# Altium PCB MD017A ISO-F28027F.PcbDoc (part 2 of 2)
Units mil, origin at the board's own origin, x right, y up, seen from the top; angles counter-clockwise.
Board outline 2600 x 2000 mil, 2 copper layers (Top, Bottom), stack 61.811 mil thick; 81 components, 98 nets, 369 pads, 191 vias.
Unrouted connection lines stored in the file: 2.
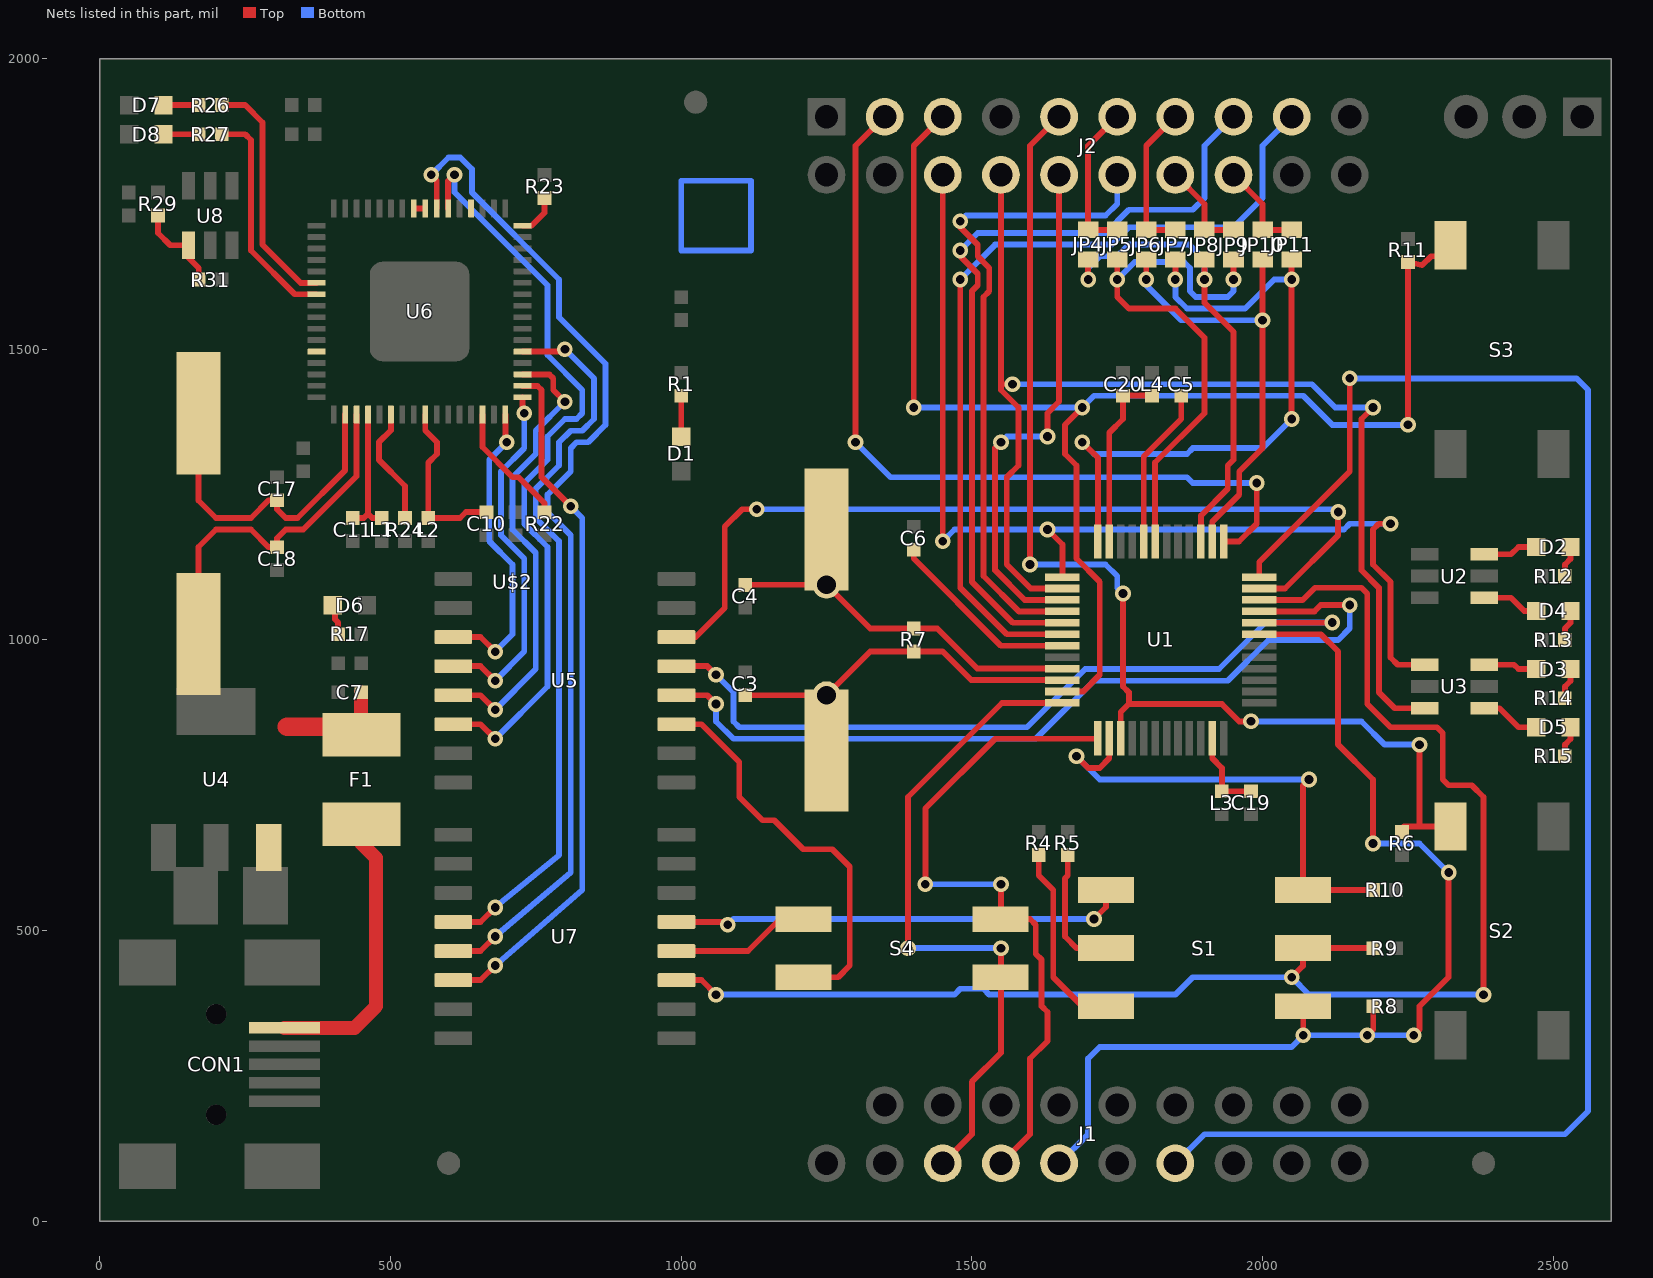
[diagram p2: the nets of this part, all layers, seen from the top]

## Via types
v1: diameter 27/27 (per signal layer), hole 15, Top to Bottom, tented both sides, 191 vias

## Nets (pads, with @x,y where several pads share a name; then routed paths per layer and width w, separated by ;. In a path a pad name is that pad's centre, name@x,y a point inside that pad or via, vN(x,y) a via of type N, cw(c..) or ccw(c..) an arc to the next point about the centre after c; other vN are vias at no path point) (continued)
GPIO2: J2.6 U1.37 U3.1 | length 1835.4
  Top w10: v1(1450,1170) J2.6@1450,1800 ; v1(1630,1190) 1655.71,1164.29 U1.37@1655.71,1108.27 ; v1(2220,1200) 2200,1200 2190,1190 2190,1130 2220,1100 2220,970 2232.6,957.4 U3.1@2278.82,957.4
  Bottom w10: v1(1450,1170) 1470,1190 v1(1630,1190) 2140,1190 2150,1200 v1(2220,1200)
GPIO3: J2.8 U1.38 U3.3 | length 2061
  Top w10: J2.8@1550,1800 1550,1440 ; v1(1570,1440) 1550,1440 ; U1.38@1655.71,1088.58 1601.42,1088.58 1560,1130 1560,1280 1580,1300 1580,1400 1550,1430 1550,1440 ; v1(2190,1400) 2170,1380 2170,1120 2200,1090 2200,910 2227.4,882.6 U3.3@2278.82,882.6
  Bottom w10: v1(1570,1440) 2085,1440 2125,1400 v1(2190,1400)
GPIO4: J2.10 U1.39 | length 903.4
  Top w10: v1(1550,1340) 1540,1330 1540,1120 1591.1,1068.9 U1.39@1655.71,1068.9 ; v1(1630,1350) 1630,1390 1650,1410 J2.10@1650,1800
  Bottom w10: v1(1550,1340) 1560,1350 v1(1630,1350)
GPIO5: J2.12 U1.40 | length 1128.2
  Top w10: v1(1480,1720) 1480,1710 1510,1680 1510,1660 1530,1640 1530,1600 1520,1590 1520,1110 1580.79,1049.21 U1.40@1655.71,1049.21
  Bottom w10: v1(1480,1720) 1490,1730 1730,1730 1750,1750 J2.12@1750,1800
GPIO6: J2.15 U1.41 | length 1389.5
  Top w10: v1(1480,1670) 1480,1660 1510,1630 1510,1610 1500,1600 1500,1100 1570.47,1029.53 U1.41@1655.71,1029.53
  Bottom w10: v1(1480,1670) 1510,1700 1730,1700 1770,1740 1880,1740 1900,1760 1900,1850 J2.15@1950,1900
GPIO7: J2.17 U1.42 | length 1477.6
  Top w10: v1(1480,1620) 1480,1090 1560.16,1009.84 U1.42@1655.71,1009.84
  Bottom w10: v1(1480,1620) 1540,1680 1740,1680 1770,1710 1950,1710 2000,1760 2000,1850 J2.17@2050,1900
GPIO12: J2.5 R11.1 S3.P$4 U1.47 | length 2341.5
  Top w10: v1(1400,1400) 1400,1850 J2.5@1450,1900 ; U1.47@1655.71,911.42 1691.42,911.42 1720,940 1720,1100 1680,1140 1680,1300 1660,1320 1660,1370 v1(1690,1400) ; v1(2250,1370) R11.1@2250,1650.31 2274.41,1644.41 2290,1660 2304,1660 S3.P$4@2323,1679
  Bottom w10: v1(1400,1400) v1(1690,1400) 1710,1420 2070,1420 2120,1370 v1(2250,1370)
GPIO16: JP4.2 JP8.2 U1.27 | length 838.2
  Top w10: v1(1700,1620) JP4.2@1700,1641 ; U1.27@1893.9,1169.29 1893.9,1213.9 1940,1260 1940,1300 1950,1310 1950,1530 1900,1580 v1(1900,1620) JP8.2@1900,1641
  Bottom w10: v1(1700,1620) 1700,1640 1720,1660 1750,1660 1770,1680 1874.41,1680 1900,1654.41 v1(1900,1620) 1900,1640
GPIO17: JP6.2 JP10.2 U1.26 | length 763.4
  Top w10: v1(1800,1620) JP6.2@1800,1641 ; U1.26@1913.58,1169.29 1913.58,1203.58 1960,1250 1960,1290 2000,1330 v1(2000,1550) JP10.2@2000,1641
  Bottom w10: v1(1800,1620) 1800,1610 1860,1550 v1(2000,1550)
GPIO18: J1.14 U1.24 | length 2811.8
  Top w10: U1.24@1994.29,1108.27 1994.29,1134.29 2150,1290 v1(2150,1450)
  Bottom w10: J1.14@1850,100 1900,150 2520,150 2560,190 2560,1430 2540,1450 v1(2150,1450)
GPIO19: J2.3 U1.25 | length 1439.2
  Top w10: v1(1300,1340) 1300,1850 J2.3@1350,1900 ; U1.25@1933.27,1169.29 1959.29,1169.29 1990,1200 v1(1990,1270)
  Bottom w10: v1(1300,1340) 1360,1280 1870,1280 1880,1270 v1(1990,1270)
GPIO28: J1.6 S4.P$1 U1.48 | length 1164.5
  Top w10: v1(1390,470) 1390,730 1551.73,891.73 U1.48@1655.71,891.73 ; J1.6@1450,100 1500,150 1500,240 1550,290 1550,419.5 S4.P$1@1549.5,420 1550,420.5 v1(1550,470)
  Bottom w10: v1(1390,470) v1(1550,470)
GPIO29: J1.8 S4.P$3 U1.1 | length 1183
  Top w10: v1(1420,580) 1420,710 1540,830 1716.02,830 U1.1@1716.73,830.71 ; J1.8@1550,100 1600,150 1600,280 1630,310 1630,360 1620,370 1620,450 1610,460 1610,510 1600,520 S4.P$3@1549.5,520 1550,520.5 v1(1550,580)
  Bottom w10: v1(1420,580) v1(1550,580)
GPIO32: JP5.2 JP9.2 U1.31 | length 921.7
  Top w10: JP5.2@1750,1641 v1(1750,1620) 1750,1590 1770,1570 1850,1570 1900,1520 1900,1390 1815.16,1305.16 U1.31@1815.16,1169.29 ; v1(1950,1620) JP9.2@1950,1641
  Bottom w10: v1(1750,1620) 1780,1650 1865,1650 1875,1640 1875,1600 1885,1590 1940,1590 1950,1600 v1(1950,1620)
GPIO33: JP7.2 JP11.2 U1.36 | length 1115.9
  Top w10: v1(1690,1340) 1716.73,1313.27 U1.36@1716.73,1169.29 ; v1(1850,1620) JP7.2@1850,1641 ; v1(2050,1380) v1(2050,1620) JP11.2@2050,1641
  Bottom w10: v1(1690,1340) 1710,1320 1870,1320 1880,1330 2000,1330 v1(2050,1380) ; v1(1850,1620) 1850,1590 1870,1570 1970,1570 2020,1620 v1(2050,1620)
GPIO34: J1.10 R8.2 S1.1 U1.19 | length 1846.6
  Top w10: U1.19@1994.29,1009.84 2100.16,1009.84 2130,980 2130,820 2190,760 v1(2190,650) ; S1.1@2069.29,370 2070,369.29 v1(2070,320) ; v1@2184.41,324.41 v1(2180,320) 2190.32,330.32 R8.2@2190.31,370 ; v1(2260,320) 2270,330 2270,370 2320,420 v1(2320,600)
  Bottom w10: J1.10@1650,100 1700,150 1700,280 1720,300 2050,300 v1(2070,320) v1(2180,320) v1(2260,320) ; v1(2190,650) 2270,650 v1(2320,600)
J2: J2.11 JP4.1 JP5.1 | length 218.7
  Top w10: JP4.1@1700,1718 1700,1850 J2.11@1750,1900 ; JP4.1@1717,1705 JP5.1@1733,1705
JTAG_TRST: S1.4 U7.5 | length 834.8
  Top w10: U7.5@981.1,515 1075,515 v1(1080,510) ; v1(1710,520) 1730.71,540.71 S1.4@1730.71,570 1770,579.29 S1.4@1770,580
  Bottom w10: v1(1080,510) 1090,520 v1(1710,520)
N$1: U5.3 U6.P$16 | length 521.7
  Top w10: U5.3@618.9,1005 655,1005 v1(680,980) ; U6.P$16@697.64,1387.83 697.64,1342.36 v1(700,1340)
  Bottom w10: v1(680,980) 710,1010 710,1130 670,1170 670,1310 v1(700,1340)
N$2: C17.1 U6.P$2 U$2.1@170,1390 | length 578.3
  Top w10: U$2.1@170,1390 170,1240 200,1210 260,1210 290.32,1240.31 C17.1@305,1240.31 305,1225 320,1210 340,1210 422.05,1292.05 U6.P$2@422.05,1387.83
N$3: C19.1 L3.1 U1.11 | length 147.8
  Top w10: U1.11@1913.58,830.71 1913.58,796.42 1930,780 L3.1@1930,739.69 C19.1@1980,739.69
N$4: U5.4 U6.P$17 | length 613.8
  Top w10: U5.4@618.9,955 655,955 v1(680,930) ; U6.P$17@727.17,1417.36 727.17,1392.83 v1(730,1390)
  Bottom w10: v1(680,930) 730,980 730,1140 690,1180 690,1290 730,1330 v1(730,1390)
N$5: U6.P$18 U7.14 | length 1194.7
  Top w10: U7.14@618.9,415 655,415 v1(680,440) ; U6.P$18@727.17,1437.05 752.95,1437.05 760,1430 760,1280 v1(810,1230)
  Bottom w10: v1(680,440) 830,570 830,1210 v1(810,1230)
N$6: U5.5 U6.P$19 | length 788.2
  Top w10: U5.5@618.9,905 655,905 v1(680,880) ; U6.P$19@727.17,1456.73 773.27,1456.73 780,1450 780,1430 v1(800,1410)
  Bottom w10: v1(680,880) 750,950 750,1150 710,1190 710,1280 750,1320 750,1360 v1(800,1410)
N$7: C18.1 U6.P$3 U$2.2@170,1010 | length 612.3
  Top w10: U$2.2@170,1010 170,1160 200,1190 260,1190 290.32,1159.69 C18.1@305,1159.69 305,1175 320,1190 350,1190 441.73,1281.73 U6.P$3@441.73,1387.83
N$8: C3.1 R7.2 U1.46 U$2.2@1250,810 U$2.2@1250,905 | length 692.3
  Top w10: C3.1@1110,905.31 1115.59,905 U$2.2@1250,905 ; U$2.2@1250,810 U$2.2@1250,905 ; U1.46@1655.71,931.1 1498.9,931.1 1449.69,980.32 R7.2@1400,980.31 1325.31,980.32 U$2.2@1250,905
N$9: R4.1 S1.6 | length 332.1
  Top w10: R4.1@1615,630.31 1615,595 1640,570 1640,420 1690,370 S1.6@1730.71,370
N$10: R5.1 S1.5 | length 221.4
  Top w10: R5.1@1665,630.31 1665,595 1660,590 1660,490 1680,470 S1.5@1730.71,470
N$11: C4.1 R7.1 U1.45 U$2.1@1250,1095 U$2.1@1250,1190 | length 700.5
  Top w10: C4.1@1110,1094.69 1115.59,1095 U$2.1@1250,1095 ; U$2.1@1250,1190 U$2.1@1250,1095 ; U1.45@1655.71,950.79 1509.21,950.79 1440.31,1019.69 R7.1@1400,1019.69 1325.31,1019.69 U$2.1@1250,1095
N$12: R29.1 R31.1 U8.1 | length 157.9
  Top w10: R29.1@100,1730.31 100,1700 121.18,1678.82 U8.1@152.6,1678.82 152.6,1657.4 170.32,1639.69 R31.1@170.31,1620
N$13: U6.P$21 U7.12 | length 1248.4
  Top w10: U7.12@618.9,515 655,515 v1(680,540) ; U6.P$21@727.17,1496.1 796.1,1496.1 v1(800,1500)
  Bottom w10: v1(680,540) 790,630 790,1170 750,1210 750,1260 790,1300 790,1340 810,1360 830,1360 850,1380 850,1450 v1(800,1500)
N$14: R23.1 U6.P$32 | length 72.4
  Top w10: U6.P$32@727.17,1712.64 742.64,1712.64 765,1735 R23.1@765,1760.31
N$15: U6.P$40 U6.P$41 | length 19.7
  Top w10: U6.P$41@540.16,1742.17 U6.P$40@559.84,1742.17
N$16: U5.6 U6.P$38 | length 1301.9
  Top w10: U6.P$38@599.21,1742.17 599.21,1789.21 v1(610,1800) ; U5.6@618.9,855 655,855 v1(680,830)
  Bottom w10: v1(610,1800) 610,1770 770,1610 770,1490 830,1430 830,1390 820,1380 800,1380 770,1350 770,1310 730,1270 730,1200 770,1160 770,920 v1(680,830)
N$17: R24.2 U6.P$6 | length 205.4
  Top w10: U6.P$6@500.79,1387.83 500.79,1360.79 480,1340 480,1310 525,1265 R24.2@525,1209.69
N$18: C5.1 U1.32 | length 277.7
  Top w10: U1.32@1795.47,1169.29 1795.47,1315.47 1860,1380 C5.1@1860,1420.31
N$19: R26.1 U6.P$54 | length 412.8
  Top w10: R26.1@209.69,1920 250,1920 280,1890 280,1680 345.79,1614.21 U6.P$54@372.83,1614.21
N$20: C11.1 L1.2 U6.P$4 | length 226.9
  Top w10: C11.1@435,1209.69 454.09,1209.69 461.42,1217.01 ; U6.P$4@461.42,1387.83 461.42,1217.01 ; L1.2@485,1209.69 468.74,1209.69 461.42,1217.01
N$21: U6.P$39 U7.13 | length 1769.2
  Top w10: v1(570,1800) 579.53,1790.47 U6.P$39@579.53,1742.17 ; U7.13@618.9,465 655,465 v1(680,490)
  Bottom w10: v1(570,1800) 600,1830 620,1830 640,1810 640,1770 790,1620 790,1555 870,1475 870,1370 840,1340 820,1340 810,1330 810,1290 770,1250 770,1220 810,1180 810,600 v1(680,490)
N$22: R27.1 U6.P$55 | length 388.5
  Top w10: R27.1@209.69,1870 250,1870 260,1860 260,1670 335.47,1594.53 U6.P$55@372.83,1594.53
N$23: D7.C R26.2 | length 60.8
  Top w10: D7.C@109.53,1920 R26.2@170.31,1920
N$24: D8.C R27.2 | length 60.8
  Top w10: D8.C@109.53,1870 R27.2@170.31,1870
N$25: C6.1 U1.43 | length 333.1
  Top w10: C6.1@1400,1155.31 1400,1140 1549.84,990.16 U1.43@1655.71,990.16
N$26: C10.1 L2.2 U6.P$9 | length 297.1
  Top w10: U6.P$9@559.84,1387.83 559.84,1360.16 580,1340 580,1320 565,1305 L2.2@565,1209.69 619.69,1209.69 630,1220 664.69,1220 C10.1@665,1219.69
N$27: D1.A R1.1 | length 70.8
  Top w10: D1.A@1000,1349.53 R1.1@1000,1420.31
N$28: D2.C U2.6 | length 94.5
  Top w10: U2.6@2381.18,1147.4 2427.4,1147.4 2440,1160 D2.C@2470.47,1160
N$29: D4.C U2.4 | length 98.7
  Top w10: U2.4@2381.18,1072.6 2427.4,1072.6 2450,1050 D4.C@2470.47,1050
N$30: D2.A R12.1 | length 54.1
  Top w10: R12.1@2519.69,1110 2520,1110.31 2520,1130 2529.53,1139.53 D2.A@2529.53,1160
N$31: D4.A R13.1 | length 54.1
  Top w10: R13.1@2519.69,1000 2520,1000.32 2520,1020 2529.53,1029.53 D4.A@2529.53,1050
N$32: D6.A R17.1 | length 54.1
  Top w10: D6.A@400.47,1060 404.41,1056.06 404.41,1035.59 410,1030 410,1010.32 R17.1@410.31,1010
N$34: R22.2 U6.P$14 | length 218.2
  Top w10: U6.P$14@658.27,1387.83 658.27,1331.73 710,1280 720,1280 765,1235 R22.2@765,1219.69
N$35: D3.C U3.6 | length 92.4
  Top w10: U3.6@2381.18,957.4 2432.6,957.4 2440,950 D3.C@2470.47,950
N$36: D5.C U3.4 | length 102.8
  Top w10: U3.4@2381.18,882.6 2407.4,882.6 2440,850 D5.C@2470.47,850
N$37: D3.A R14.1 | length 54.1
  Top w10: R14.1@2519.69,900 2520,900.32 2520,920 2529.53,929.53 D3.A@2529.53,950
N$38: D5.A R15.1 | length 54.1
  Top w10: R15.1@2519.69,800 2520,800.32 2520,820 2529.53,829.53 D5.A@2529.53,850
N$39: C20.1 L4.1 U1.35 | length 310.8
  Top w10: U1.35@1736.42,1169.29 1736.42,1356.42 1760,1380 C20.1@1760,1420.31 L4.1@1810,1420.31
N$40:  | length 480
  Bottom w10: 1000,1670 1120,1670 1120,1790 1000,1790 1000,1670
N$41: J2.14 JP8.1 JP9.1 | length 118.7
  Top w10: J2.14@1850,1800 1900,1750 JP8.1@1900,1718 ; JP8.1@1917,1705 JP9.1@1933,1705
N$42: J2.13 JP6.1 JP7.1 | length 218.7
  Top w10: JP6.1@1800,1718 1800,1850 J2.13@1850,1900 ; JP6.1@1817,1705 JP7.1@1833,1705
N$48: J2.16 JP10.1 JP11.1 | length 118.7
  Top w10: J2.16@1950,1800 2000,1750 JP10.1@2000,1718 ; JP10.1@2017,1705 JP11.1@2033,1705
PWREN#: U6.P$60
RESET#: J2.9 R6.1 S2.P$4 U1.3 | length 2001.8
  Top w10: v1(1600,1130) 1600,1850 J2.9@1650,1900 ; U1.3@1756.1,830.71 1756.1,876.1 1770,890 ; v1(1760,1080) 1760,920 1770,910 1770,890 ; v1(1980,860) 1960,860 1930,890 1770,890 ; R6.1@2240,669.69 2243.41,679 2270,679 ; v1(2270,820) 2270,679 ; S2.P$4@2323,679 2270,679
  Bottom w10: v1(1600,1130) 1730,1130 1750,1110 1750,1090 v1(1760,1080) ; v1(1980,860) 2170,860 2210,820 v1(2270,820)
SCI_RX: S4.P$2 U5.11 | length 703.3
  Top w10: U5.11@981.1,855 1035,855 1100,790 1100,730 1140,690 1160,690 1210,640 1260,640 1290,610 1290,440 1270,420 S4.P$2@1210.5,420
SCI_TX: S4.P$4 U7.4 | length 252.2
  Top w10: U7.4@981.1,465 1115,465 1170,520 S4.P$4@1210.5,520
SUSPEND#: U6.P$36
TCK: U1.23 U5.14 | length 1537.7
  Top w10: U5.14@981.1,1005 1025,1005 1075,1055 1075,1195 1105,1225 v1(1130,1225) ; U1.23@1994.29,1088.58 2038.58,1088.58 2130,1180 v1(2130,1220)
  Bottom w10: v1(1130,1225) 2125,1225 v1(2130,1220)
TDI: U1.20 U5.13 | length 1412.1
  Top w10: U5.13@981.1,955 1045,955 v1(1060,940) ; U1.20@1994.29,1029.53 2119.53,1029.53 v1(2120,1030)
  Bottom w10: v1(1060,940) 1090,910 1090,860 1100,850 1595,850 1695,950 1925,950 2005,1030 v1(2120,1030)
TDO: R9.2 S1.2 U1.22 U7.3 | length 2663.1
  Top w10: U7.3@981.1,415 1035,415 v1(1060,390) ; U1.22@1994.29,1068.9 2068.9,1068.9 2090,1090 2170,1090 2180,1080 2180,890 2220,850 2300,850 2310,840 2310,760 2320,750 2360,750 2380,730 v1(2380,390) ; v1(2050,420) 2069.29,439.29 S1.2@2069.29,470 R9.2@2190.31,470
  Bottom w10: v1(1060,390) 1470,390 1480,400 1520,400 1530,390 1850,390 1880,420 v1(2050,420) 2080,390 v1(2380,390)
TMS: U1.21 U5.12 | length 1496.4
  Top w10: U5.12@981.1,905 1045,905 v1(1060,890) ; U1.21@1994.29,1049.21 2089.21,1049.21 2100,1060 v1(2150,1060)
  Bottom w10: v1(1060,890) 1060,860 1090,830 1610,830 1710,930 1940,930 2010,1000 2130,1000 2150,1020 v1(2150,1060)
TRST: R10.2 S1.3 U1.2 | length 837.8
  Top w10: v1(1680,800) 1700,780 1720,780 1736.42,796.42 U1.2@1736.42,830.71 ; v1(2080,760) 2069.29,749.29 S1.3@2069.29,570 R10.2@2190.31,570
  Bottom w10: v1(1680,800) 1720,760 v1(2080,760)
USBVCC: C7.1 F1.1 U4.3 | length 237.8
  Top w10: F1.1@435.77,851 F1.1@449.69,837.08
  Top w24: C7.1@449.69,910 449.69,837.08 F1.1@450,836.77 ; F1.1@450,851 F1.1@481,851
  Top w32: 322,851 F1.1@435.77,851
XUSB: CON1.1@318.11,332.99 F1.2 | length 495.8
  Top w10: F1.2@450,650 F1.2@450,683.23
  Top w24: CON1.1@318.11,332.99 437.99,332.99 475,370 475,625 F1.2@450,650
pads on no net: CON1.1@200,183.39 CON1.1@200,356.61 CON1.4 CON1.M1 CON1.M2 CON1.M3 CON1.M4 J1.19 J2.7 J2.18 J2.20 S2.P$1 S2.P$3 S3.P$1 S3.P$3 U5.7 U6.P$22 U6.P$23 U6.P$24 U6.P$26 U6.P$27 U6.P$28 U6.P$29 U6.P$30 U6.P$33 U6.P$34 U6.P$43 U6.P$44 U6.P$45 U6.P$46 U6.P$48 U6.P$52 U6.P$53 U6.P$57 U6.P$58 U6.P$59 U7.6 U7.11

## Polygon pours and split planes (outlines as drawn)
GND on Bottom "Bottom-GND" (solid, remove dead copper, shelved, pour order 0): 946,1979 2584,1979 2584,21 946,21
AGND on Bottom "Bottom-AGND" (solid, remove dead copper, shelved, pour order 6): 15,1980 735,1980 735,1735 795,1735 795,255 735,255 735,20 15,20
AGND on Top "Top-AGND" (solid, remove dead copper, shelved, pour order 4): 15,1980 735,1980 735,1735 795,1735 795,1135 705,1135 705,265 735,265 735,20 15,20
GND on Top "Top-GND" (solid, remove dead copper, shelved, pour order 2): 946,1979 2584,1979 2584,21 946,21

## Keep-outs
Bottom:
  rectangle: 1010,1680 1110,1780
Keep-Out Layer:
  the board outline again, w10

## Silkscreen, mask and mechanical layers (free items; w line width, h text height)
Top Overlay:
  lines w5: 2190,1450 2210,1450 ; 2190,1740 2210,1740 2210,1450 ; 2370,1230 2390,1210 ; 2410,1230 2390,1210 ; 30,1895 30,1845 485,1845 485,1895 ; 30,1895 485,1895 ; 30,1895 30,1945 485,1945 485,1895 ; 2210,1450 2210,1260 2390,1260 2390,1210
  lines w10: 1725,1650 1725,1655 ; 1725,1675 1725,1685 ; 1725,1705 1725,1710 ; 1775,1750 1775,1730 ; 1800,1775 1825,1750 1875,1750 1875,1730 ; 1825,1650 1825,1655 ; 1825,1675 1825,1685 ; 1825,1705 1825,1710 ; 1900,1775 1925,1750 1975,1750 1975,1730 ; 1900,1875 1900,1955 1890,1965 1710,1965 1700,1955 1700,1775 1670,1745 1670,1730 ; 1925,1650 1925,1655 ; 1925,1675 1925,1685 ; 1925,1705 1925,1710 ; 2000,1775 2025,1750 2080,1750 2080,1730 ; 2025,1650 2025,1655 ; 2025,1675 2025,1685 ; 2025,1705 2025,1710 ; 2100,1770 2100,1570 2080,1550 ; 2390,860 2390,775 2560,775 2560,875 ; 2390,1050 2390,975 2560,975 ; 2390,1170 2390,1190 2560,1190 2560,1080 ; 2410,1080 2560,1080 ; 2415,875 2560,875 ; 1670,1630 1775,1630 ; 1670,1630 1670,1730 ; 1670,1630 1670,1550 1735,1550 1795,1490 1895,1490 1955,1550 2080,1550 ; 1670,1730 1775,1730 ; 1775,1630 1875,1630 ; 1775,1630 1775,1730 ; 1775,1730 1875,1730 ; 1875,1630 1975,1630 ; 1875,1630 1875,1730 ; 1875,1730 1975,1730 ; 1975,1630 2080,1630 ; 1975,1630 1975,1730 ; 1975,1730 2080,1730 ; 2080,1550 2080,1630 ; 2080,1630 2080,1730 ; 2560,875 2560,975 ; 2560,975 2560,1080
  text "RX" at 410,1900 h62
  text "TX" at 410,1850 h62
  text "3V3" at 2569.2,1746.09 h62 r90
  text "1" at 1269.89,1725.36 h62 r90
  text "GND" at 2369.72,1722.56 h62 r90
  text "GND" at 2469.72,1722.56 h62 r90
  text "16" at 1716.35,1577.45 h49.6 r90
  text "17" at 1816.9,1577.45 h49.6 r90
  text "16" at 1916.35,1577.45 h49.6 r90
  text "17" at 2016.9,1577.45 h49.6 r90
  text "32" at 1766.35,1574.83 h49.6 r90
  text "33" at 1866.35,1574.51 h49.6 r90
  text "32" at 1966.35,1574.83 h49.6 r90
  text "33" at 2066.35,1574.51 h49.6 r90
  text "GPIO" at 1795,1505 h49.6
  text "Q3" at 55,1460 h27.2
  text "GPIO12" at 2270,1390 h62 r90
  text "PWR" at 1070,1270 h62 r90
  text "GPIO" at 2426.6,1210.28 h62
  text "0" at 2450,1140 h49.6 r90
  text "1" at 2450,1030 h49.6 r90
  text "PWR" at 550,1010 h62 r90
  text "2" at 2450,930 h49.6 r90
  text "EMU" at 550,890 h62 r90
  text "Q1" at 1375,865 h27.2
  text "3" at 2450,830 h49.6 r90
  text "Q2" at 1375,825 h27.2
  text "ISO-F28027F" at 1610,730 h77.5 r90
  text "Boot" at 1800.37,660.91 h62
  text "RST" at 2460,640 h62 r90
  text "Serial" at 1220,630 h62
  text "1" at 1270,270 h62 r90
  text "10" at 2170,270 h62 r90
  text "v1.0" at 2210,50 h77.5
Bottom Solder:
  lines w10: 1000,1670 1120,1670 1120,1790 1000,1790 1000,1670
Dimension:
  the board outline again, w10
tDocu:
  drawing of 364 lines, arcs and shapes, not listed
  text "DESIGN INFORMATION" at 8768.02,5301 h60
  text "MIN. TRACK WIDTH:" at 8123.46,5121 h60
  text "10" at 9190,5121 h60
  text "MIL" at 9374.46,5121 h60
  text "MIL" at 9374.46,4989.99 h60
  text "MIN. CLEARANCE:" at 8123.46,4989 h60
  text "5" at 9215,4989 h60
  text "MIN. VIA PAD SIZE:" at 8123.46,4857 h60
  text "27" at 9189.71,4857 h60
  text "MIL" at 9374.46,4857 h60
  text "0.05mm (2MIL)" at 8818.46,4715.29 h60
  text "MINIMUM ANNULAR RING" at 7794.23,4711 h60
  text "EXTERNAL" at 9526.46,4711 h60
  text "PER" at 7994.23,4593 h60
  text "IPC-D-275 CLASS 2 LEVEL C" at 8214.23,4593 h60
  text "MIL, HOLES" at 9702.46,4480.71 h60
  text "+/-" at 9310,4480 h60
  text "+/-" at 10164,4480 h60
  text "REGISTRATION TOLERANCES:" at 7794.23,4475 h60
  text "METAL" at 8994,4475 h60
  text "5" at 9570.2,4475 h60
  text "3" at 10403.2,4475 h60
  text "MIL" at 10519.46,4475 h60
  text "+/-" at 10164,4362 h60
  text "HOLE SIZE TOLERANCE (UNLESS OTHERWISE SPECIFIED):" at 7794.23,4357 h60
  text "3" at 10403.2,4357 h60
  text "MIL" at 10519.46,4357 h60
  text "MATERIAL:" at 7719.46,4147.54 h60
  text "FR-4 High Tg" at 8705.9,4007.21 h60
  text "FR-408" at 8140.46,3998.64 h60
  text "OTHER" at 9628.46,3998.64 h60
  text "X" at 8551,3995 h60
  text "62 MIL (1.6mm) +/-10%" at 8460.56,3835.92 h60
  text "THICKNESS:" at 7794.23,3831.64 h60
  text "X" at 8332.4,3831.64 h60
  text "OTHER" at 9745.46,3831.64 h60
  text "TOLERANCE:" at 7794.23,3673.64 h60
  text "X" at 8633.53,3673.64 h60
  text "ANSI IPC-6012 TYPE 3 CLASS 2" at 8820.48,3673.64 h60
  text "OTHER +/-" at 8820.46,3517.64 h60
  text "BOW & TWIST:" at 7794.23,3360.64 h60
  text "X" at 8633.53,3360.64 h60
  text "ANSI IPC-6012 TYPE 3 CLASS 2" at 8820.48,3360.64 h60
  text "OTHER +/-" at 8820.46,3202.13 h60
  text "Layer" at 2822.5,3072.5 h60
  text "Name" at 3232.41,3072.5 h60
  text "Material" at 4162.16,3072.5 h60
  text "Thickness" at 5021.92,3072.5 h60
  text "Constant" at 5671.76,3072.5 h60
  text "Board Layer Stack" at 6241.62,3072.5 h60
  text "DRILLING:" at 7719.46,3063.64 h60
  text "Top Overlay" at 3232.41,2952.5 h60
  text "REFERENCE:" at 7794.23,2946.64 h60
  text "X" at 8442.46,2946.64 h60
  text "AS SHOWN" at 8629.46,2946.64 h60
  text "X" at 9343.46,2946.64 h60
  text "NC_DRILL FILES" at 9480.46,2946.64 h60
  text "Top Solder" at 3232.41,2832.5 h60
  text "Solder Resist" at 4162.16,2832.5 h60
  text "0,40mil" at 5021.92,2832.5 h60
  text "3.5" at 5671.76,2832.5 h60
  text "PTH COPPER THICKNESS:" at 7794.23,2788.64 h60
  text "X" at 8924.46,2788.64 h60
  text "20-30 um" at 9061.46,2788.64 h60
  text "OTHER" at 9778.46,2788.64 h60
  text "1" at 2822.5,2712.5 h60
  text "Top" at 3232.41,2712.5 h60
  text "1,38mil" at 5021.92,2712.5 h60
  text "BOARD FINISH:" at 7719.46,2629.64 h60
  text "Dielectric 1" at 3232.41,2592.5 h60
  text "FR-4" at 4162.16,2592.5 h60
  text "59,06mil" at 5021.92,2592.5 h60
  text "4.8" at 5671.76,2592.5 h60
  text "SILKSCREEN:" at 7874.68,2511.64 h60
  text "X" at 8823.46,2511.64 h60
  text "TOP" at 8949.46,2511.64 h60
  text "X" at 9333.46,2511.64 h60
  text "BOTTOM" at 9460.46,2511.64 h60
  text "2" at 2822.5,2472.5 h60
  text "Bottom" at 3232.41,2472.5 h60
  text "1,38mil" at 5021.92,2472.5 h60
  text "Bottom Solder" at 3232.41,2352.5 h60
  text "Solder Resist" at 4162.16,2352.5 h60
  text "0,40mil" at 5021.92,2352.5 h60
  text "3.5" at 5671.76,2352.5 h60
  text "SILKSCREEN COLOR:" at 7874.68,2344.64 h60
  text "X" at 8822.42,2344.64 h60
  text "WHITE" at 8949.46,2344.64 h60
  text "OTHER" at 9460.46,2344.64 h60
  text "Bottom Overlay" at 3232.41,2232.5 h60
  text "X" at 8953.42,2185.44 h60
  text "GREEN" at 9080.46,2185.44 h60
  text "OTHER" at 9698.46,2185.44 h60
  text "SOLDER RESIST COLOR:" at 7874.68,2174.64 h60
  text "X" at 8953.42,2015.44 h60
  text "MATTE" at 9080.46,2015.44 h60
  text "SEMI-GLOSS" at 9698,2014.8 h60
  text "IMMERSION GOLD (ENIG)" at 8780.46,1826.92 h60
  text "ENEPIG" at 10118,1823.64 h60
  text "SURFACE FINISH:" at 7719.46,1822.64 h60
  text "X" at 8593.51,1822.64 h60
  text "IMM. TIN/SILVER OR EQUIV" at 8049,1665.64 h60
  text "OTHER" at 9480.46,1665.64 h60
  text "ARRAY/PANEL:" at 7719.46,1486.64 h60
  text "CUT AND TRIM PER M1 BOARD OUTLINE" at 8780.46,1482.35 h60
  text "N.C. ROUTE" at 8780.46,1330.64 h60
  text "X" at 9459.46,1330.64 h60
  text "V. SCORE" at 9646.46,1330.64 h60
  text "CERTIFICATION:" at 7719.46,1193.64 h60
  text "MATERIALS AND WORKMANSHIP FOR ALL PCBS" at 8444.46,1193.64 h60
  text "TO MEET OR EXCEED THE REQUIREMENTS OF:" at 8444.46,1095.64 h60
  text "X" at 8070.96,959.13 h60
  text "ANSI IPC-A-600F CLASS ->" at 8209.96,959.13 h60
  text "X" at 9849.02,959.13 h60
  text "2" at 9967.96,959.13 h60
  text "1" at 9652.96,957.64 h60
  text "3" at 10321.96,957.64 h60
  text "X" at 8885.02,799.64 h60
  text "RoHS" at 9021.96,799.64 h60
  text "OTHER" at 9666.36,799.64 h60
  text "PER ORDER" at 10063.42,799.64 h60
  text "ALL BOARDS MUST MEET OR EXCEED UL94-V0 REQUIREMENTS." at 7747,634 h60
  text "PCB MUST BEAR THE UL94V-0 UL REGISTERED MATERIAL ID NUMBER" at 7747,514 h60
  text "ADDITIONAL REQUIREMENTS:" at 7719.46,340.64 h60
  text "MICROSECTION:" at 7794.23,225.64 h60
  text "YES" at 8699.96,225.64 h60
  text "REQUIRED" at 9561.46,69.49 h60
  text "BARE BOARD ELEC. TEST:" at 7794.23,66.64 h60
  text "NONE" at 9099.96,66.64 h60
  text "X" at 9434.46,66.64 h60
  text "PER ORDER" at 10153.46,66.64 h60
Drill Drawing:
  circle w10: c2823.72,1680.96 r27.63
  lines w10: 2796.09,1418.51 2809.9,1418.51 2823.72,1404.7 2837.53,1418.51 2851.34,1418.51 2837.53,1432.32 2851.34,1446.14 2837.53,1446.14 2823.72,1459.95 2809.9,1446.14 2796.09,1446.14 2809.9,1432.32 2796.09,1418.51 ; 2796.09,1529.02 2851.34,1529.02 2851.34,1584.27 2796.09,1584.27 2796.09,1529.02 ; 2796.09,1777.66 2823.72,1791.47 2851.34,1777.66 2837.53,1805.28 2851.34,1832.91 2823.72,1819.1 2796.09,1832.91 2809.9,1805.28 2796.09,1777.66
  lines w12: 2746,1367.4 5778.56,1367.4 ; 2746,1864.68 5778.56,1864.68 ; 3083.86,1243.08 3083.86,1989 ; 3415.86,1243.08 3415.86,1989 ; 4052.43,1243.08 4052.43,1989 ; 4311.57,1243.08 4311.57,1989 ; 4686.72,1243.08 4686.72,1989 ; 5212.13,1243.08 5212.13,1989 ; 2746,1243.08 5778.56,1243.08 5778.56,1989 2746,1989 2746,1243.08
  text "Symbol" at 2820.59,1901.98 h72
  text "Quantity" at 3121.16,1901.98 h72
  text "Finished Hole Size" at 3453.16,1901.98 h72
  text "Plated" at 4089.72,1901.98 h72
  text "Hole Type" at 4348.86,1901.98 h72
  text "Drill Layer Pair" at 4724.02,1901.98 h72
  text "Hole Tolerance" at 5249.43,1901.98 h72
  text "191" at 3121.16,1777.66 h60
  text "15,00mil (0,381mm)" at 3453.16,1777.66 h60
  text "PTH" at 4089.72,1777.66 h60
  text "Round" at 4348.86,1777.66 h60
  text "Top - Bottom" at 4724.02,1777.66 h60
  text "2" at 3121.16,1653.34 h60
  text "32,00mil (0,813mm)" at 3453.16,1653.34 h60
  text "PTH" at 4089.72,1653.34 h60
  text "Round" at 4348.86,1653.34 h60
  text "Top - Bottom" at 4724.02,1653.34 h60
  text "2" at 3121.16,1529.02 h60
  text "35,43mil (0,900mm)" at 3453.16,1529.02 h60
  text "PTH" at 4089.72,1529.02 h60
  text "Round" at 4348.86,1529.02 h60
  text "Top - Bottom" at 4724.02,1529.02 h60
  text "42" at 3121.16,1404.7 h60
  text "40,00mil (1,016mm)" at 3453.16,1404.7 h60
  text "PTH" at 4089.72,1404.7 h60
  text "Round" at 4348.86,1404.7 h60
  text "Top - Bottom" at 4724.02,1404.7 h60
  text "237 Total" at 3121.16,1280.38 h60
Mechanical 69:
  drawing of 12972 lines, arcs and shapes, not listed
Mechanical 82:
  text "D:/SmartProjects/Snc/a4_bn_logo2.bmp" at 0,-2.5 h0.85

## Dimensions
0,0 to 2600,0 on tDocu
0,0 to 0,2000 on tDocu

## Text inside footprints (layer, text, board x,y; h text height)
S1: Top Overlay "ON" at 1810.43,350.31 h37.2 r90; Top Overlay "1" at 2012.2,362.13 h37.2 r90; Top Overlay "2" at 2012.2,462.13 h37.2 r90; Top Overlay "3" at 2012.2,562.13 h37.2 r90
S4: Top Overlay "ON" at 1205,345 h62